# Altium PCB autoPCB.PcbDoc
Units mil, origin at the board's own origin, x right, y up, seen from the top; angles counter-clockwise.
Board outline 6000 x 3990 mil, 2 copper layers (Top Layer, Bottom Layer); 55 components, 51 nets, 226 pads, 23 vias.
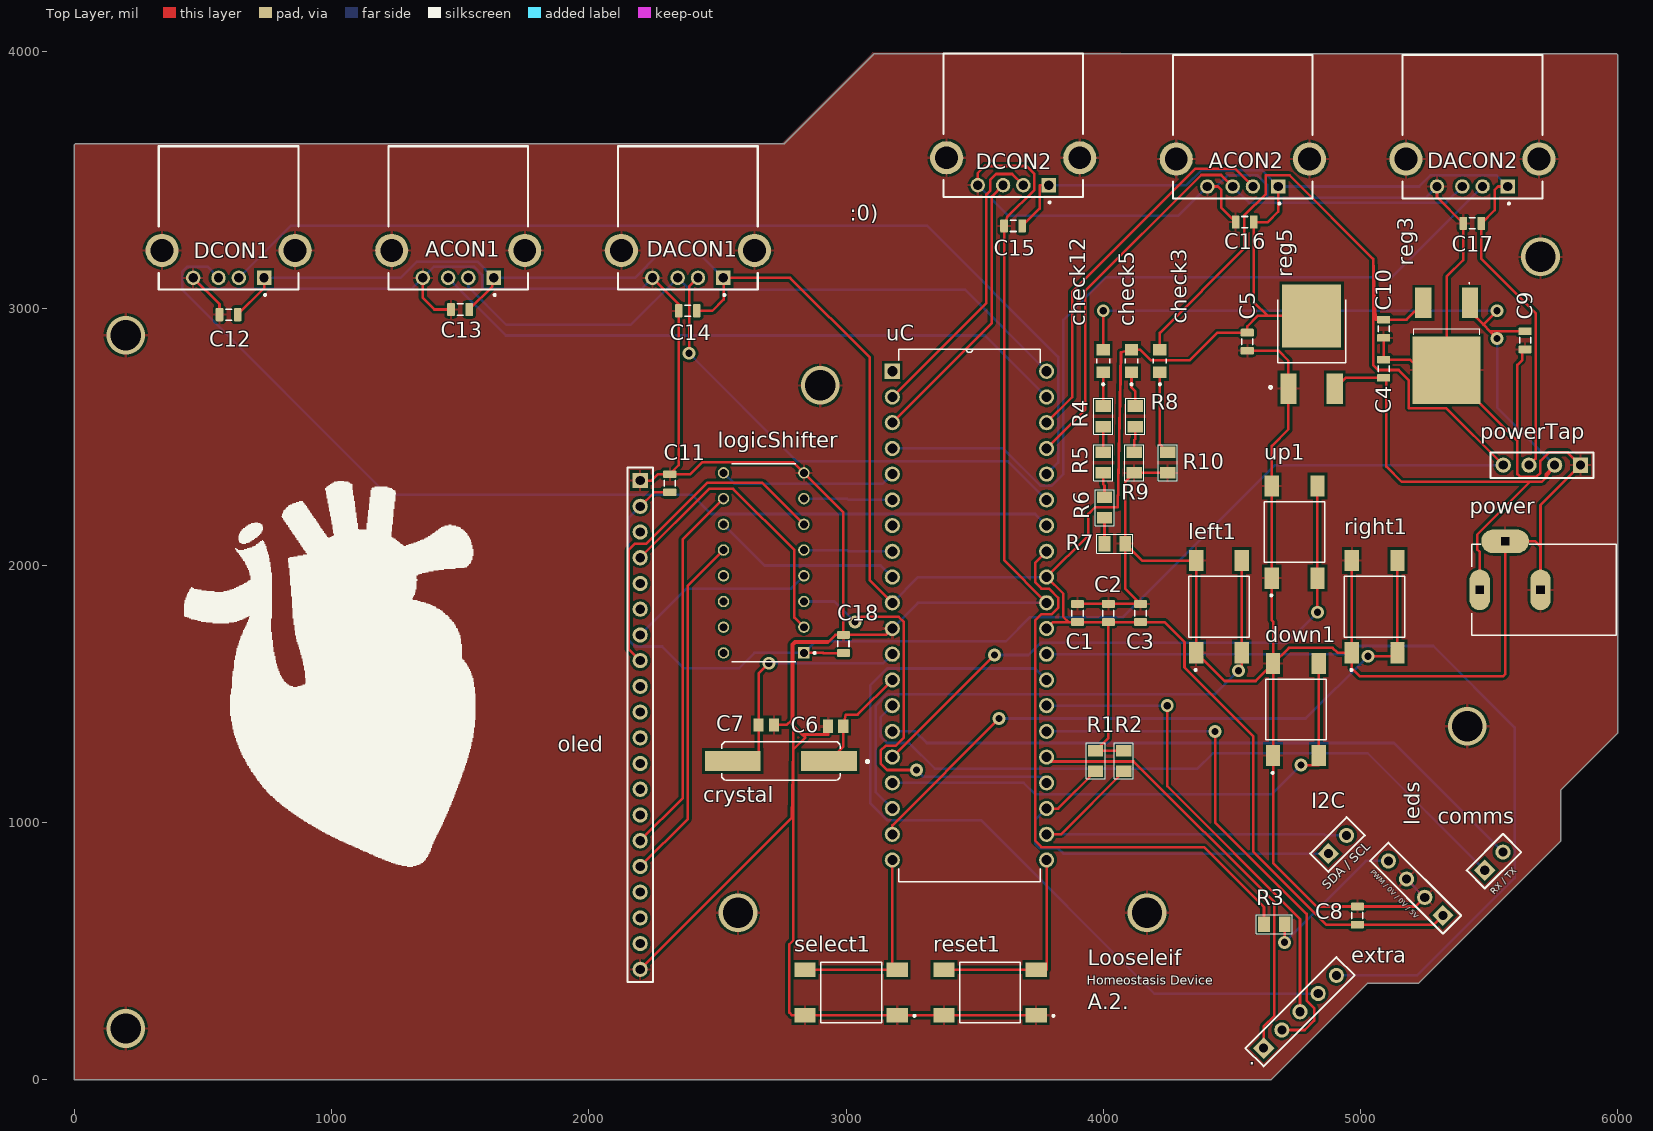
[diagram p0: Top Layer view]
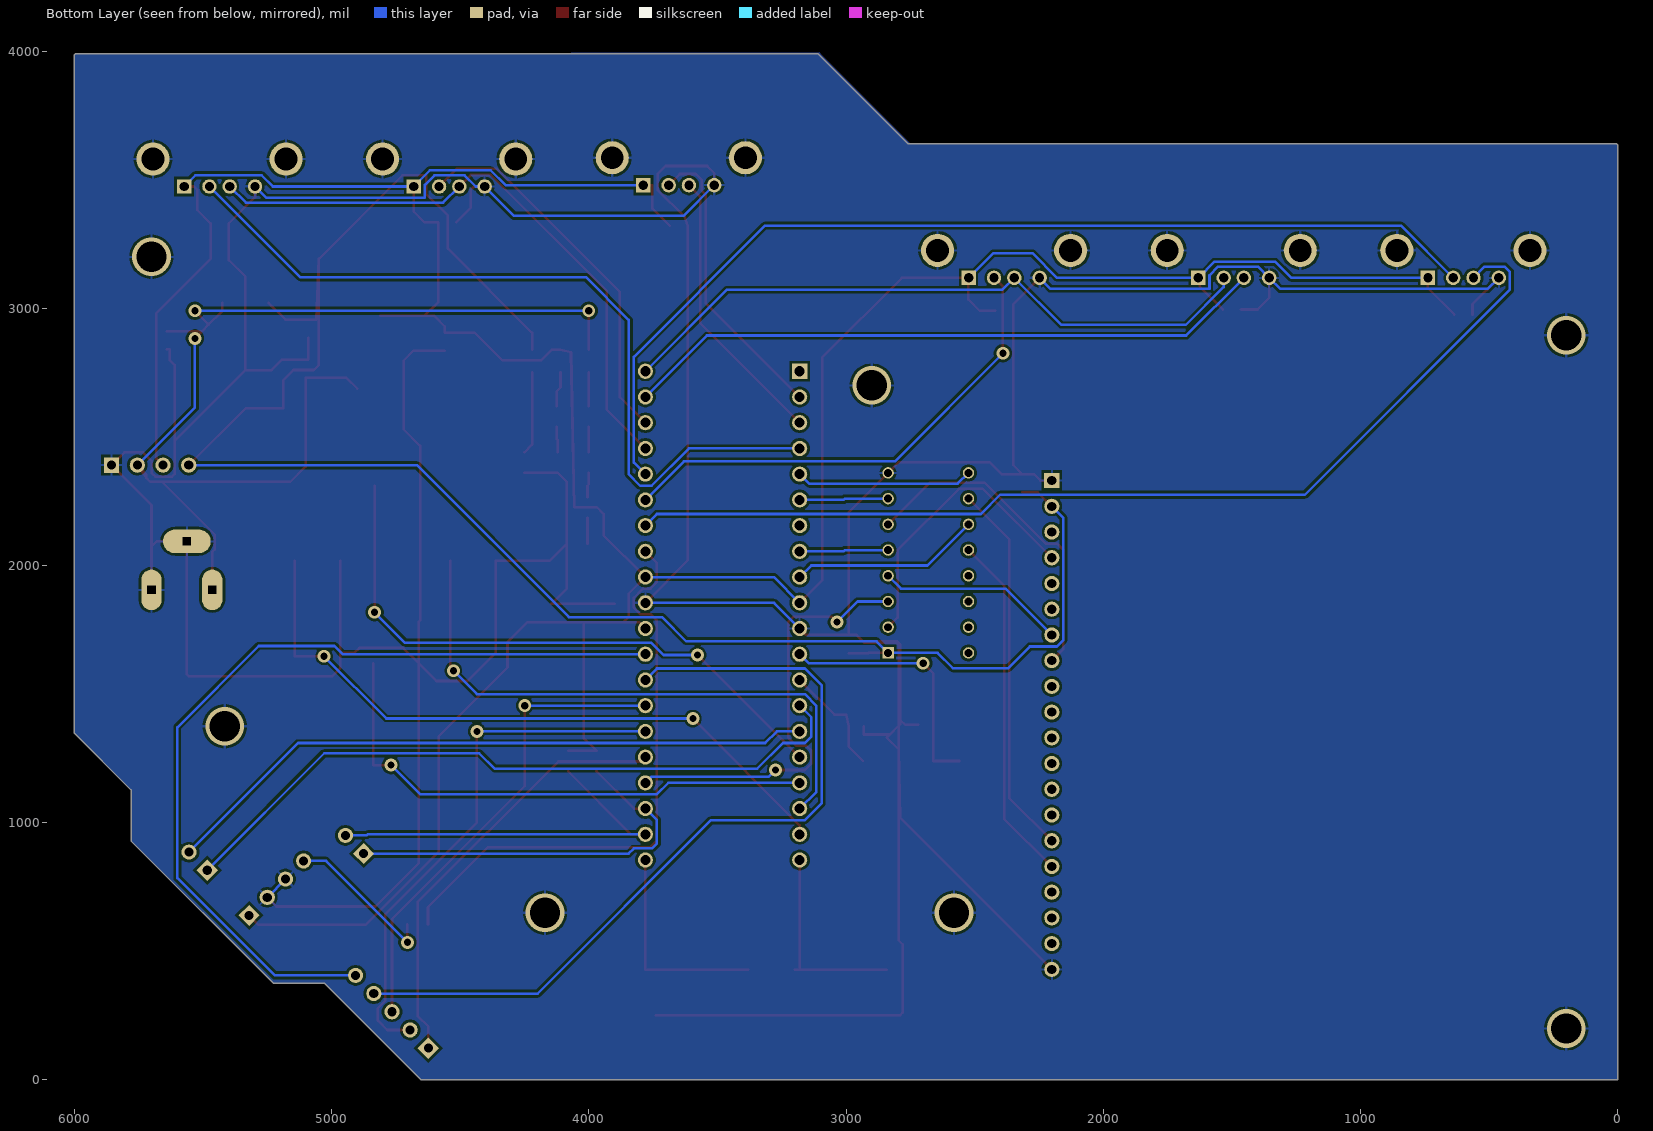
[diagram p1: Bottom Layer view, seen from below]
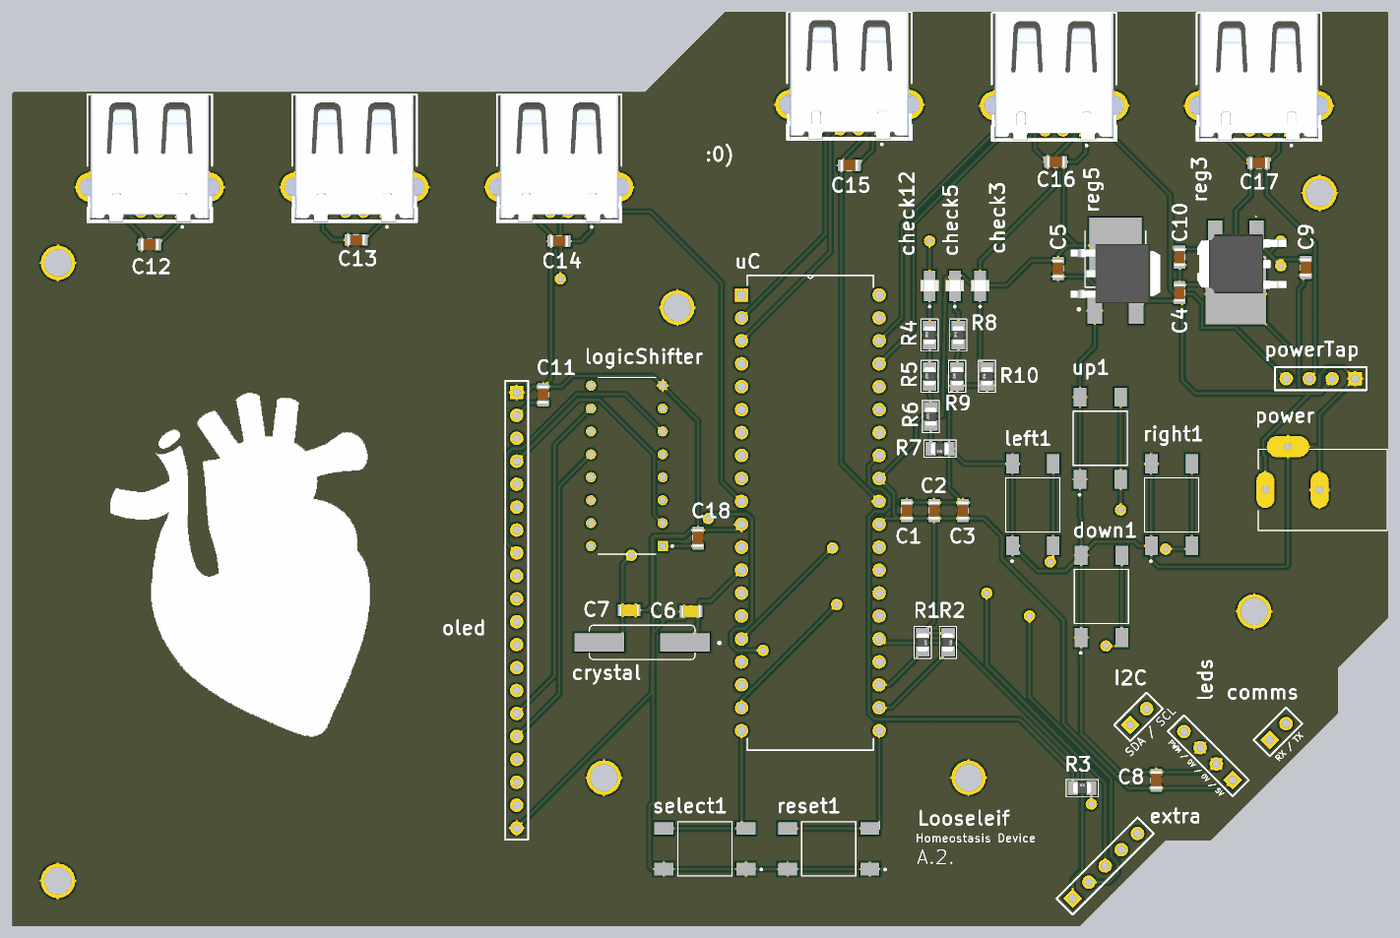
[diagram p2: 3D render of the assembled board from above, using the file's embedded part models]

## Layer stack, top to bottom
Top Solder: solder mask 0.4, Solder Resist, Dk 3.5
Top Layer: signal copper 1.4
Dielectric 1: dielectric 12.6, FR-4, Dk 4.8
Bottom Layer: signal copper 1.4
Bottom Solder: solder mask 0.4, Solder Resist, Dk 3.5

## Board outline
0,315 0,3634.14 5.86,3640 2760,3640 3110,3990 5994.14,3990 6000,3984.14 6000,1348.41 5779.15,1127.55 5779.15,929.15 5225.85,375.85 5027.45,375.85 4651.59,0 0,0

## Design rules (kind name [scope] priority, off if disabled: settings)
Clearance [All] p1: gap=10 ignorepadtopadclearanceinfootprint=FALSE except(0: Arc-Hole Track-Hole SMDPad-Hole THPad-Hole Via-Hole Fill-Hole Poly-Hole Region-Hole Text-Hole)
PolygonConnect [All] p1: connectstyle=Relief reliefconductorwidth=10 reliefentries=4 polygonreliefangle="90 Angle" airgapwidth=10
RoutingVias [All] p1: holewidth=28 width=50 viastyle="Through Hole" minholewidth=28 minwidth=50 maxholewidth=28 maxwidth=50
SolderMaskExpansion [All] p1: expansion=4 istentingtop=FALSE
Width [All] p1: maxlimit=10 minlimit=10 preferedwidth=10
30 further rules are at their usual default settings.

## Components (designator, comment, footprint, x,y, rotation, side; value= is the part's Value field where it differs from the comment)
ACON1 "USB1130-15-A_REVA" GCT_USB1130-15-A_REVA 1492.63,3225 r180 top
ACON2 "USB1130-15-A_REVA" GCT_USB1130-15-A_REVA 4542.63,3580 r180 top
C1 "Capacitor 4.7µF +/-40% 25V 0805" CAPC0805(2012)145_L 3900,1815 r270 top value=100nF
C2 "Capacitor 4.7µF +/-40% 25V 0805" CAPC0805(2012)145_L 4020,1815 r270 top value=100nF
C3 "Capacitor 4.7µF +/-40% 25V 0805" CAPC0805(2012)145_L 4145,1815 r270 top value=100nF
C4 "Capacitor 4.7µF +/-40% 25V 0805" CAPC0805(2012)145_L 5090,2765 r90 top value="10 uF"
C5 "Capacitor 4.7µF +/-40% 25V 0805" CAPC0805(2012)145_L 4560,2870 r270 top value="22 uF"
C6 "Capacitor 1 uF +/- 10% 50 V 0805" CAPC2013X135X45ML10T25 2960,1375 r0 top value=20pF
C7 "Capacitor 1 uF +/- 10% 50 V 0805" CAPC2013X135X45ML10T25 2690,1380 r180 top value=20pF
C8 "Capacitor 4.7µF +/-40% 25V 0805" CAPC0805(2012)145_L 4987.84,639.29 r90 top value=100nF
C9 "Capacitor 4.7µF +/-40% 25V 0805" CAPC0805(2012)145_L 5640,2875 r270 top value="100 nF"
C10 "Capacitor 4.7µF +/-40% 25V 0805" CAPC0805(2012)145_L 5090,2920 r270 top value="2.2 uF"
C11 "Capacitor 4.7µF +/-40% 25V 0805" CAPC0805(2012)145_L 2315,2320 r90 top value=220nF
C12 "Capacitor 4.7µF +/-40% 25V 0805" CAPC0805(2012)145_L 600,2975 r0 top value=100nF
C13 "Capacitor 4.7µF +/-40% 25V 0805" CAPC0805(2012)145_L 1500,2995 r0 top value=100nF
C14 "Capacitor 4.7µF +/-40% 25V 0805" CAPC0805(2012)145_L 2385,2990 r0 top value=100nF
C15 "Capacitor 4.7µF +/-40% 25V 0805" CAPC0805(2012)145_L 3650,3320 r0 top value=100nF
C16 "Capacitor 4.7µF +/-40% 25V 0805" CAPC0805(2012)145_L 4550,3335 r0 top value=100nF
C17 "Capacitor 4.7µF +/-40% 25V 0805" CAPC0805(2012)145_L 5435,3330 r0 top value=100nF
C18 "Capacitor 4.7µF +/-40% 25V 0805" CAPC0805(2012)145_L 2990,1695 r90 top value=100nF
check3 "7012X1" LED_7012X1 4220,2795 r90 top
check5 "7012X1" LED_7012X1 4110,2795 r90 top
check12 "7012X1" LED_7012X1 4000,2795 r90 top
comms "Header 2" HDR1X2 5483.28,815 r45 top
crystal "FOXSDLF/160-20" XTAL_FOXSDLF/160-20 2747.01,1240 r180 top
DACON1 "USB1130-15-A_REVA" GCT_USB1130-15-A_REVA 2385.25,3225 r180 top
DACON2 "USB1130-15-A_REVA" GCT_USB1130-15-A_REVA 5435.25,3580 r180 top
DCON1 "USB1130-15-A_REVA" GCT_USB1130-15-A_REVA 600,3225 r180 top
DCON2 "USB1130-15-A_REVA" GCT_USB1130-15-A_REVA 3650,3585 r180 top
down1 "4-1437565-2" SW_4-1437565-2 4749,1440 r90 top
extra "Header 5" HDR1X5 4623.58,123.58 r45 top
I2C "Header 2" HDR1X2 4875.3,880 r45 top
leds "Header 4" HDR1X4 5320.71,639.29 r135 top
left1 "4-1437565-2" SW_4-1437565-2 4450,1840 r90 top
logicShifter "CD4050BE" DIP794W45P254L1969H508Q16 2680,2010 r180 top
oled "Header 20" HDR1X20 2200,2330 r270 top
power "DC-005" NINIGI_DC-005 5562.2,1905 r180 top
powerTap "Header 4" HDR1X4 5855,2390 r180 top
R1 "R_0805_4.7K_1%" 0805_Resistor 3970,1240 r270 top value=4.7K
R2 "R_0805_4.7K_1%" 0805_Resistor 4080,1240 r270 top value=4.7K
R3 "R_0805_4.7K_1%" 0805_Resistor 4665,605 r0 top value=220
R4 "R_0805_4.7K_1%" 0805_Resistor 4000,2580 r90 top value=220
R5 "R_0805_4.7K_1%" 0805_Resistor 4000,2400 r90 top value=220
R6 "R_0805_4.7K_1%" 0805_Resistor 4005,2225 r90 top value=220
R7 "R_0805_4.7K_1%" 0805_Resistor 4045,2085 r180 top value=220
R8 "R_0805_4.7K_1%" 0805_Resistor 4125,2580 r90 top value=220
R9 "R_0805_4.7K_1%" 0805_Resistor 4120,2400 r90 top value=220
R10 "R_0805_4.7K_1%" 0805_Resistor 4250,2400 r90 top value=220
reg3 "LF33CDT-TRY" LD1117DT33 5335,2890 r90 top
reg5 "NCP1117DT33" VREG_NCP1117DT33 4810,2847.95 r0 top
reset1 "4-1437565-2" SW_4-1437565-2 3560,340 r180 top
right1 "4-1437565-2" SW_4-1437565-2 5055,1840 r90 top
select1 "4-1437565-2" SW_4-1437565-2 3020,340 r180 top
uC "ATMEGA644PV-10PU" DIP254P1524X483-40 3780,855 r0 top
up1 "4-1437565-2" SW_4-1437565-2 4744,2130 r90 top

## Footprints (in the part's own frame and the unit in brackets; to place one, negate y for a bottom-side part, rotate by r counter-clockwise, add the part's x,y. Pads: shape width x height; smd on the part's side, far side on the other; paste and mask are expansions set on the pad)
0805_Resistor [mil] "0805 Resistor"
  rect 45x60 smd: 1(-40,0) 2(40,0)
  silkscreen extent -70,-37 70,37, body extent -39,-25 39,25, height 31
CAPC0805(2012)145_L [mm] "Chip Capacitor, Body 2.0x1.2mm, Height 1.45mm, IPC High Density"
  rrect25% 0.76x1.3 smd: 1(-0.9,0) 2(0.89,0)
  silkscreen extent -0.3,-0.55 0.3,0.55, body extent -1,-0.6 1,0.6, height 1.45
CAPC2013X135X45ML10T25 [mm] "Chip Capacitor, 2-Leads, Body 2.10x1.35mm, IPC Low Density"
  rect 1x1.3 smd: 1(-0.75,0) 2(0.75,0)
  body extent -1.05,-0.67 1.05,0.67, height 1.35
DIP254P1524X483-40 [mil]
  rect 59x59 hole 39: 1(-600,1900)
  round 59 hole 39: 2(-600,1800) 3(-600,1700) 4(-600,1600) 5(-600,1500) 6(-600,1400) 7(-600,1300) 8(-600,1200) 9(-600,1100) 10(-600,1000) 11(-600,900) 12(-600,800) 13(-600,700) 14(-600,600) 15(-600,500) 16(-600,400) 17(-600,300) 18(-600,200) 19(-600,100) 20(-600,0) 21(0,0) 22(0,100) 23(0,200) 24(0,300) 25(0,400) 26(0,500) 27(0,600) 28(0,700) 29(0,800) 30(0,900) 31(0,1000) 32(0,1100) 33(0,1200) 34(0,1300) 35(0,1400) 36(0,1500) 37(0,1600) 38(0,1700) 39(0,1800) 40(0,1900)
  silkscreen extent -575,-85 -25,1985, body extent -620,-85 20,1985
DIP794W45P254L1969H508Q16 [mm]
  rect 1.13x1.13 hole 0.78: 1(-3.97,8.89)
  round 1.13 hole 0.78: 2(-3.97,6.35) 3(-3.97,3.81) 4(-3.97,1.27) 5(-3.97,-1.27) 6(-3.97,-3.81) 7(-3.97,-6.35) 8(-3.97,-8.89) 9(3.97,-8.89) 10(3.97,-6.35) 11(3.97,-3.81) 12(3.97,-1.27) 13(3.97,1.27) 14(3.97,3.81) 15(3.97,6.35) 16(3.97,8.89)
  silkscreen extent -5.13,-9.77 3.18,9.77, body extent -3.17,-9.65 3.17,9.65
GCT_USB1130-15-A_REVA [mm]
  rect 1.428x1.428 hole 0.92: 1(-3.5,2.71)
  round 1.428 hole 0.92: 2(-1,2.71) 3(1,2.71) 4(3.5,2.71)
  round 3.276 hole 2.26: S1(-6.57,0) S2(6.57,0)
  silkscreen extent -6.9,-10.28 6.9,4.5, body extent -7.8,-10.28 7.8,3.88, height 6.99
HDR1X2 [mm] "Connector; Header; 2 Position"
  rect 1.5x1.5 hole 0.9: 1(0,0)
  round 1.5 hole 0.9: 2(2.54,0)
  silkscreen extent -1.27,-1.27 3.81,1.27
HDR1X4 [mm] "Connector; Header; 4 Position"
  rect 1.5x1.5 hole 0.9: 1(0,0)
  round 1.5 hole 0.9: 2(2.54,0) 3(5.08,0) 4(7.62,0)
  silkscreen extent -1.27,-1.27 8.89,1.27
HDR1X5 [mm] "Connector; Header; 5 Position"
  rect 1.5x1.5 hole 0.9: 1(0,0)
  round 1.5 hole 0.9: 2(2.54,0) 3(5.08,0) 4(7.62,0) 5(10.16,0)
  silkscreen extent -1.27,-1.27 11.43,1.27
HDR1X20 [mm] "Connector; Header; 20 Position"
  rect 1.5x1.5 hole 0.9: 1(0,0)
  round 1.5 hole 0.9: 2(2.54,0) 3(5.08,0) 4(7.62,0) 5(10.16,0) 6(12.7,0) 7(15.24,0) 8(17.78,0) 9(20.32,0) 10(22.86,0) 11(25.4,0) 12(27.94,0) 13(30.48,0) 14(33.02,0) 15(35.56,0) 16(38.1,0) 17(40.64,0) 18(43.18,0) 19(45.72,0) 20(48.26,0)
  silkscreen extent -1.27,-1.27 49.53,1.27
LD1117DT33 [mm]
  rect 3x1.6 smd: 1(3.325,-2.3) 2(3.325,2.3)
  rect 6.7x6.7 smd: 3(-3.325,0)
  silkscreen extent 0.18,-3.25 5.32,3.25, body extent -3.27,-5.6 3.27,4.27, height 2.4
LED_7012X1 [mm]
  rect 1.15x1.3 smd: A(1.125,0) C(-1.125,0)
  silkscreen extent -2.4,-0.62 0.23,0.62, body extent -0.62,-1 0.62,1, height 0.73
NINIGI_DC-005 [mm]
  oval 4.7x2.35 hole 0.8 square: 2(0,-4.8)
  oval 2x4 hole 0.8 square: 3(-3.5,0) 4(2.5,0)
  silkscreen extent -11,-4.5 3.3,4.5, body extent -11.06,-4.56 3.36,4.56
SW_4-1437565-2 [mm]
  rect 2.1x1.4 smd: 1(-4.55,2.25) 2(4.55,2.25) 3(-4.55,-2.25) 4(4.55,-2.25)
  silkscreen extent -6.35,-3 3,3
VREG_NCP1117DT33 [mm]
  rect 1.6x3 smd: 1(-2.285,-4.08) 3(2.285,-4.08)
  rect 5.8x6.2 smd: 4(0,3.1)
  silkscreen extent -4.19,-4.09 3.36,4.72, body extent -4.95,-3.25 4.95,3.25, height 2.39
XTAL_FOXSDLF/160-20 [mm]
  rect 5.5x2 smd: 1(-4.75,0) 2(4.75,0)
  silkscreen extent -8.6,-1.9 5.85,1.9

## Part data
ACON1 ACON2 DACON1 DACON2 DCON1 DCON2 down1 left1 logicShifter reset1 right1 select1 up1: Package=None, Availability=Unavailable, Price=None
  ACON1 ACON2 DACON1 DACON2 DCON1 DCON2: MF="{'manufacturer': u'Global Connector Technology'}", MP=USB1130-15-A_REVA
  down1 left1 reset1 right1 select1 up1: MF="{'manufacturer': u'TE Connectivity'}", MP=4-1437565-2
  logicShifter: MF="{'manufacturer': u'Texas Instruments'}", MP=CD4050BE
C1 C2 C3 C4 C5 C8 C9 C10 C11 C12 C13 C14 C15 C16 C17 C18: library part CMP-001-00080-5, "Chip Capacitor, 4.7µF +/-40%, 25V, 0805, Thickness 1.45 mm", Capacitor Type=Ceramic, Case/Package=0805, Max Operating Temperature=85°C, Min Operating Temperature=-55°C, Tolerance=20%, Voltage Rating=25V, Mounting Technology=SMT, Pins=2
C6 C7: library part CMP-001-00007-7, "Chip Capacitor, 1 uF, +/- 10%, 50 V, 0805 (2012 Metric)", Capacitor Type=Ceramic, Case/Package=0805, Max Operating Temperature=125°C, Min Operating Temperature=-55°C, Tolerance=10%, Voltage Rating=50V, Mounting Technology=SMT, Pins=2
check3 check5 check12: "Red LED Indication - Discrete 1.7V 0805 (2012 Metric)", Package=None, Availability=Unavailable, MF="{'manufacturer': u'Visual'}", MP=7012X1, Price=None
comms I2C: "Header, 2-Pin", LatestRevisionDate=17-Jul-2002, LatestRevisionNote="Re-released for DXP Platform.", Publisher="Altium Limited"
crystal: "Crystal 16MHz 20pF 2-Pin HC-49/SD", Package=None, Availability=Unavailable, MF="{'manufacturer': u'Fox Electronics'}", MP=FOXSDLF/160-20, Price=None
extra: "Header, 5-Pin", LatestRevisionDate=17-Jul-2002, LatestRevisionNote="Re-released for DXP Platform.", Publisher="Altium Limited"
leds powerTap: "Header, 4-Pin", LatestRevisionDate=17-Jul-2002, LatestRevisionNote="Re-released for DXP Platform.", Publisher="Altium Limited"
oled: "Header, 20-Pin", LatestRevisionDate=17-Jul-2002, LatestRevisionNote="Re-released for DXP Platform.", Publisher="Altium Limited"
power: "DC Jack", Package=None, Availability=Unavailable, MF="{'manufacturer': u'Best Inc.'}", MP=DC-005, Price=None
R1 R2 R3 R4 R5 R6 R7 R8 R9 R10: library part CMP-058-000045-1, "RES 4.7K OHM 1/8W 1% 0805 SMD", Manufacturer=Yageo, Manufacturer Part Number=AC0805FR-074K7L, Package=0805_Resistor, Power Rating=0.125W, ComponentLink1Description=DigiKey, ComponentLink1URL=https://www.digikey.com/products/en?keywords=YAG3738TR-ND, Design Item ID=R_0805_4.7K_1%, DigiKey PN=YAG3738TR-ND, Source=resistor.SchLib, SVP Creator="Andrew Wu"
reg3: "<b>Linear Voltage Regulators VLDV Reg Inhibit 0.45V 50uA 500mA</b><p> Source: <a href=\"https://componentsearchengine.com/Datasheets/1/LF33CDT-TRY.pdf\"> Datasheet </a>", Package=None, Availability=Unavailable, MF="{'manufacturer': u'STMicroelectronics'}", MP=LF33CDT-TRY, Price=None
reg5: "1.0 A Positive LDO Linear Voltage Regulator (Fixed and Adjustable) Vout: 3.3 V", Package=None, Availability=Unavailable, MF="{'manufacturer': u'ON Semiconductor'}", MP=NCP1117DT33, Price=None
uC: "8-bit Microcontroller with In-System Programmable  Flash", Package=None, Availability=Unavailable, MF="{'manufacturer': u'Microchip Technology'}", MP=ATMEGA644PV-10PU, Price=None

## Via types
v1: diameter 50, hole 28, Top Layer to Bottom Layer, 16 vias
v2: diameter 150, hole 118.11, Top Layer to Bottom Layer, 7 vias

## Nets (pads, with @x,y where several pads share a name; then routed paths per layer and width w, separated by ;. In a path a pad name is that pad's centre, name@x,y a point inside that pad or via, vN(x,y) a via of type N, cw(c..) or ccw(c..) an arc to the next point about the centre after c; other vN are vias at no path point)
+3: C10.1 C11.1 C18.1 check3.A logicShifter.1 oled.2 powerTap.4 reg3.2 | length 7593.3
  Top Layer w10: oled.2 2254.57,2284.57 C11.1 ; logicShifter.1 2912,1660 2912.43,1659.57 C18.1 ; check3.A 4220,2904 4548,3232 4548,3360 4632,3444 4632,3517 4724,3517 5049,3192 ; reg3.2 5178.98,2955.43 C10.1 5060,2955.43 5049,3192 ; powerTap.4 5333,2612 5188,2612 5188,2720 5148,2760 5069,2760 5049,2780 5049,3192
  Bottom Layer w10: oled.2 2155,2185 2155,1710 2180,1685 2285,1685 2369,1601 2585,1601 2644,1660 logicShifter.1 2881.3,1705 3621,1705 3715.5,1799.5 4077.5,1799.5 4668,2390 powerTap.4
+5: ACON1.1 ACON2.1 C1.2 C2.2 C3.2 C5.1 C8.1 C12.2 C13.2 C14.2 C15.2 C16.2 C17.2 check5.A DACON1.1 DACON2.1 DCON1.1 DCON2.1 leds.1 powerTap.3 R1.1 R2.1 reg5.4 uC.10 uC.30 uC.32 | length 13840.4
  Top Layer w10: C12.2 737.8,3077.76 DCON1.1 ; C13.2 1625,3084.96 1625,3118.31 ACON1.1 ; C14.2 2480,2990 2524,3034 DACON1.1@2524,3118.31 ; DACON1.1 DACON1.1@2524,3118.31 ; uC.10 3093,1942 3093,2808 2782.69,3118.31 DACON1.1@2524,3118.31 ; C15.2 3752.48,3387.44 3752.48,3478.31 DCON2.1 ; uC.30 3804.96,1779.96 3864.54,1779.96 ; R2.1 R1.1 4020,1330 C2.2 ; ACON2.1 4680.42,3375.42 4640,3335 C16.2 4585.04,3024.96 4640,2970 ; reg5.4 4640,2970 ; leds.1 5285.28,603.86 C8.1 4866.65,603.86 4584,886.51 4584,1335.52 4316,1603.52 4316,1701.96 4238,1779.96 C3.2 C2.2 ; DACON2.1 5535.31,3473.31 5522,3460 5522,3381.96 C17.2 5470.04,3192 5681,2981.04 5681,2416 powerTap.3 ; 3864.54,1779.96 C1.2 C2.2 ; 3864.54,1779.96 3844.5,1800 3844.5,1890.5 uC.32 3942,2117 3942,2200 3969,2227 4056,2227 4069,2828.29 check5.A 4143.71,2839.29 4186,2797 4335.57,2797 4444,2905.43 C5.1 4560,2930 4600,2970 4640,2970
  Bottom Layer w10: DCON1.1 1268.31,3118.31 1331.42,3181.42 1567.31,3181.42 ACON1.1 2179.31,3118.31 2275,3214 2427.36,3214 DACON1.1 ; uC.10 3280,1955 uC.32 ; DCON2.1 4323.31,3478.31 4381.42,3536.42 4617.31,3536.42 ACON2.1 5228.31,3473.31 5272,3517 5529.36,3517 DACON2.1
+12: C4.1 C9.1 check12.A power.4 powerTap.2 reg3.1 reg5.3 | length 4510.4
  Top Layer w10: check12.A v1(4000,2990) ; reg5.3 4942.2,2729.57 C4.1 5101,2729.57 5101,2384.47 5160,2325.47 5659.47,2325.47 ; reg3.1 5425.55,2988 5477.62,2935.93 ; power.4 5463.78,2052.22 5454,2062 5454,2120 5659.47,2325.47 ; v1(5531,2882.55) 5503.12,2910.43 ; v1(5531,2990) 5531,2989.32 5477.62,2935.93 ; C9.1 5503.12,2910.43 ; 5477.62,2935.93 5503.12,2910.43 ; 5659.47,2325.47 5705,2325.47 5719.53,2340 ; 5719.53,2340 powerTap.2 5719.53,2354.53 5719.53,2340
  Bottom Layer w10: v1(4000,2990) v1(5531,2990) ; v1(5531,2882.55) 5531,2614 powerTap.2
ACON1-A1: ACON1.2 DACON1.3 uC.40 | length 2571.5
  Bottom Layer w10: ACON1.2 1532,3082.25 1679.24,2935 2162.57,2935 DACON1.3 2392.19,3072 3463,3072 uC.40
ACON1-A2: ACON1.3 uC.39 | length 2518.7
  Bottom Layer w10: ACON1.3 1677.56,2894 3541,2894 uC.39
ACON2-A1: ACON2.2 uC.38 | length 1479.5
  Top Layer w10: uC.38 3879,2654 3879,3062.62 4359.38,3543 4512.3,3543 ACON2.2
ACON2-A2: ACON2.3 DACON2.3 uC.37 | length 2397.6
  Top Layer w10: uC.37 3930,2605 3930,3067 4381,3518 4458.56,3518 ACON2.3
  Bottom Layer w10: ACON2.3 4566.37,3410.2 5332.77,3410.2 DACON2.3
DACON1-D1: DACON1.2 uC.35 | length 1933.8
  Top Layer w10: v1(2390,2825) 2390,3083.68 DACON1.2
  Bottom Layer w10: v1(2390,2825) 2810,2405 3630,2405 uC.35
DACON2-D1: DACON2.2 uC.4 | length 3188
  Bottom Layer w10: uC.4 3611,2455 3756,2310 3800,2310 3845,2355 3845,2955 4011,3121 5122.32,3121 DACON2.2
DC: logicShifter.3 uC.24 | length 1724.6
  Top Layer w10: v1(3035,1780) 3055,1800 3205,1800 3225,1780 3225,1331 3194,1300 3155,1300 3135,1280 3135,1230 3160,1205 v1(3274,1205)
  Bottom Layer w10: logicShifter.3 2955,1860 v1(3035,1780) ; v1(3274,1205) 3301,1178 3757,1178 uC.24
DCON1-D1: DCON1.2 uC.36 | length 3954.6
  Bottom Layer w10: DCON1.2 841.06,3320 3316,3320 3825,2811 3825,2400 uC.36
DCON1-D2: DCON1.3 uC.34 | length 3978.3
  Bottom Layer w10: DCON1.3 516.94,3162 440,3162 419,3141 419,3072 1216,2275 2401,2275 2476,2200 3735,2200 uC.34
DCON2-D1: DCON2.2 uC.2 | length 1158.4
  Top Layer w10: uC.2 3546,3021 3546,3443 3561,3458 3561,3500 3583,3522 3645.68,3522 DCON2.2
DCON2-D2: DCON2.3 uC.3 | length 1101.7
  Top Layer w10: uC.3 3567,2942 3567,3434.68 DCON2.3
dwn: down1.3 down1.4 uC.17 | length 2118.6
  Top Layer w10: v1(4769,1224) 4837.58,1224 down1.3 down1.4
  Bottom Layer w10: uC.17 3691,1155 3736,1110 4655,1110 v1(4769,1224)
ex1: extra.1 uC.25 | length 1703.2
  Top Layer w10: uC.25 3797,1238 4118,1238 4665,691 4665,249 4623.58,207.58 extra.1
ex2: extra.2 uC.26 | length 2079.4
  Top Layer w10: v1(4435,1355) 4435,1001 4791,645 4791,308.09 4820,279.09 4820,230.92 4783.37,194.29 extra.2
  Bottom Layer w10: uC.26 v1(4435,1355)
ex3: extra.3 uC.27 | length 1872.7
  Top Layer w10: v1(4249,1455) 4249,1141.7 4765,625.7 extra.3
  Bottom Layer w10: uC.27 v1(4249,1455)
ex4: extra.4 uC.28 | length 3236.8
  Bottom Layer w10: uC.28 3735.5,1599.5 3160,1599.5 3095,1534.5 3095,1075 3160,1010 3524,1010 4198.29,335.71 extra.4
ex5: extra.5 uC.29 | length 3398.6
  Bottom Layer w10: uC.29 4956.91,1655 4989,1687.09 5282.91,1687.09 5599,1371 5599,785 5220.42,406.42 extra.5
GND: ACON1.4 ACON1.S1 ACON1.S2 ACON2.4 ACON2.S1 ACON2.S2 C1.1 C2.1 C3.1 C4.2 C5.2 C6.1 C7.1 C8.2 C9.2 C10.2 C11.2 C12.1 C13.1 C14.1 C15.1 C16.1 C17.1 C18.2 DACON1.4 DACON1.S1 DACON1.S2 DACON2.4 DACON2.S1 DACON2.S2 DCON1.4 DCON1.S1 DCON1.S2 DCON2.4 DCON2.S1 DCON2.S2 down1.1 down1.2 leds.2 leds.3 left1.1 left1.2 logicShifter.8 oled.1 oled.20 power.2 power.3 powerTap.1 R7.1 R9.1 R10.1 reg3.3 reg5.1 reset1.1 reset1.2 right1.1 right1.2 select1.1 select1.2 uC.11 uC.31 up1.1 up1.2 | length 23969.5
  Top Layer w10: DCON1.4 564.57,3015.95 C12.1 ; ACON1.4 1354.83,3040 1399.83,2995 C13.1 ; oled.20 2789.53,1019.53 2795,1284 ; oled.1 2244,2330 2269.04,2355.04 C11.2 ; DACON1.4 2349.57,3016.2 C14.1 2349.57,2389.61 C11.2 ; C7.1 2769.53,1380 2789.53,1400 ; C6.1 2930.47,1342.94 2829.53,1342.94 ; uC.11 3155.04,1730.04 C18.2 ; DCON2.4 3512.2,3525.2 3540,3553 3701.48,3553 3732.48,3522 3732.48,3460 3626.61,3354.13 C15.1 3614.57,2020.43 uC.31 ; reset1.1 reset1.2 select1.1 select1.2 2790,251.42 2779.58,261.84 2779.58,527.58 2795,543 2795,1284 ; C1.1 C2.1 C3.1 4085,1910.43 R7.1 ; R10.1 R9.1 4085,2325 R7.1 ; ACON2.4 4445.69,3473.31 4459,3460 4459,3390.57 C16.1 ; C5.2 4681,2834.96 4720.04,2795.92 reg5.1 4720.04,2529.62 4655.42,2465 up1.2 up1.1 4655.42,1787 4660.42,1782 down1.2 ; right1.2 right1.1 ; C10.2 C4.2 5192,2800.04 5232.95,2759.09 reg3.3 ; leds.2 5214.33,674.33 C8.2 4829.27,674.33 4660.42,843.18 down1.1 down1.2 ; DACON2.4 5297.46,3432.11 C17.1 5399.57,3187.57 5335,3123 reg3.3 ; C9.2 5629,2839.96 5629,2799 5610,2780 5610,2484.09 ; power.3 5700,2073.98 ; C11.2 2395,2355.04 2441.96,2402 2794.3,2402 logicShifter.8 2990,2206.3 C18.2 ; 2789.53,1400 2789.53,1694.53 2800,1705 2934,1705 ; 2789.53,1400 2789.53,1382.94 2795,1377.47 ; 2795,1284 2795,1377.47 ; 2795,1284 2841.74,1330.74 2829.53,1342.94 ; 2795,1377.47 2795,1690 2805,1700 2929,1700 2934,1705 ; 2795,1377.47 2829.53,1342.94 ; 2934,1705 2959.04,1730.04 C18.2 ; R7.1 4150.87,2019.13 left1.2 left1.1 4471.28,1551 4592.28,1551 down1.2 ; down1.2 4721.28,1680 4892,1680 4911.13,1660.87 right1.1 ; right1.1 4966.42,1600 4997.42,1569 5554,1569 5562.2,1577.2 power.2 5680,2093.98 5700,2073.98 ; reg3.3 5610,2484.09 ; 5610,2484.09 5610,2355.47 5620,2345.47 5685,2345.47 5699.53,2360 5699.53,2407 5732.53,2440 5805,2440 powerTap.1 5700,2235 5700,2073.98
  Bottom Layer w10: DCON1.4 505.51,3075 1311.52,3075 ACON1.4 1397.94,3161.42 1553.69,3161.42 1587,3128.11 1587,3075.2 2204.35,3075.2 DACON1.4 ; uC.11 3280,1855 uC.31 ; DCON2.4 3631.51,3359 4290.52,3359 ACON2.4 4439.31,3473.31 4482.42,3516.42 4600,3516.42 4637.31,3479.11 4637.31,3430.2 5254.35,3430.2 DACON2.4 ; leds.3 5179.29,780.42 5249.71,710 leds.2
  other v2: 200,200 2580,650 4170,650 5415,1375 2900,2700 200,2895 5700,3200
LEDSIG: R3.1 uC.33 | length 2322.1
  Top Layer w10: uC.33 3735,2010 3735,1935 3760,1910 3789,1910 3824.5,1874.5 3824.5,1835 3800,1810.5 3760,1810.5 3735,1785.5 3735,930 3760,905 4392,905 4625,672 R3.1
lft: left1.3 left1.4 uC.18 | length 2327.3
  Top Layer w10: v1(4526,1591) 4538.58,1603.58 left1.3 left1.4
  Bottom Layer w10: uC.18 3115,1120 3115,1454.5 3160,1499.5 4434.5,1499.5 v1(4526,1591)
MISO: uC.7
MOSI: logicShifter.7 uC.6 | length 345.8
  Bottom Layer w10: logicShifter.7 3004,2260 3009,2255 uC.6
Netcheck3_C: check3.C R10.2 | length 323.1
  Top Layer w10: check3.C 4220,2470 R10.2
Netcheck5_C: check5.C R8.2 | length 136.9
  Top Layer w10: check5.C 4110,2692 4125,2677 R8.2
Netcheck12_C: check12.C R4.2 | length 130.7
  Top Layer w10: R4.2 check12.C
Netleds_4: leds.4 R3.2 | length 604.6
  Top Layer w10: v1(4705,535) R3.2
  Bottom Layer w10: v1(4705,535) 5021.42,851.42 leds.4
NetlogicShifter_2: logicShifter.2 oled.4 | length 1124
  Top Layer w10: oled.4 2468,2298 2561,2298 2799,2060 2799,1797.3 logicShifter.2
NetlogicShifter_4: logicShifter.4 oled.7 | length 731.6
  Bottom Layer w10: oled.7 2380,1910 2786.3,1910 logicShifter.4
NetlogicShifter_6: logicShifter.6 oled.8 | length 1305.6
  Top Layer w10: oled.8 2155,1675 2155,2060 2180,2085 2224,2085 2461,2322 2674.3,2322 logicShifter.6
NetlogicShifter_10: logicShifter.10 oled.15 | length 1464.1
  Top Layer w10: oled.15 2365,1095 2365,2101.3 logicShifter.10
NetlogicShifter_12: logicShifter.12 oled.16 | length 1364.1
  Top Layer w10: oled.16 2385,1015 2385,1921.3 logicShifter.12
NetR4_1: R4.1 R5.2 | length 100
  Top Layer w10: R5.2 R4.1
NetR5_1: R5.1 R6.2 | length 97.1
  Top Layer w10: R5.1 4000,2315 4005,2310 R6.2
NetR6_1: R6.1 R7.2 | length 100
  Top Layer w10: R7.2 R6.1
NetR8_1: R8.1 R9.2 | length 102.1
  Top Layer w10: R9.2 4120,2487 4125,2492 R8.1
OSC+: C6.2 crystal.1 uC.13 | length 440.5
  Top Layer w10: crystal.1 2989.53,1295.51 C6.2 2999.53,1420 3045,1420 uC.13
OSC-: C7.2 crystal.2 uC.12 | length 991.3
  Top Layer w10: crystal.2 2660.47,1240 C7.2 2660.47,1580.47 v1(2700,1620)
  Bottom Layer w10: v1(2700,1620) 3145,1620 uC.12
RESET: logicShifter.11 uC.9 | length 741.2
  Bottom Layer w10: logicShifter.11 2683.7,2000 3135,2000 uC.9
rit: right1.3 right1.4 uC.19 | length 2642.9
  Top Layer w10: uC.19 3180,990 v1(3595,1405) ; v1(5029,1647) 5143.58,1647 right1.3 right1.4
  Bottom Layer w10: v1(3595,1405) 4787,1405 v1(5029,1647)
rst: reset1.3 reset1.4 uC.21 | length 825.6
  Top Layer w10: reset1.4 reset1.3 3780,428.58 uC.21
RX: comms.1 uC.14 | length 2752
  Bottom Layer w10: uC.14 3135,1410 3135,1335 3160,1310 3245,1310 3345,1210 4366,1210 4426,1270 5028.28,1270 comms.1
SCK: logicShifter.5 uC.8 | length 345.8
  Bottom Layer w10: logicShifter.5 3004,2060 3009,2055 uC.8
SCL: I2C.2 R2.2 uC.22 | length 1569.3
  Top Layer w10: uC.22 3835,955 R2.2
  Bottom Layer w10: uC.22 4860,955 4864.29,950.71 I2C.2
SDA: I2C.1 R1.2 uC.23 | length 1560.6
  Top Layer w10: uC.23 3825,1055 R1.2
  Bottom Layer w10: uC.23 3735,1010 3735,920 3755,900 3825,900 3845,880 I2C.1
sel: select1.3 select1.4 uC.20 | length 784.7
  Top Layer w10: select1.4 select1.3@3180,428.58 ; uC.20 select1.3@3180,428.58 ; select1.3 select1.3@3180,428.58
SS: logicShifter.9 uC.5 | length 689
  Bottom Layer w10: logicShifter.9 2565.7,2318 3143,2318 uC.5
TX: comms.2 uC.15 | length 2568.4
  Bottom Layer w10: uC.15 3269.04,1355 3314.04,1310 5129.7,1310 comms.2
up: uC.16 up1.3 up1.4 | length 2376.9
  Top Layer w10: uC.16 v1(3577,1652) ; v1(4832.58,1818) up1.3 up1.4
  Bottom Layer w10: v1(3577,1652) 3709,1652 3756.5,1699.5 4714.08,1699.5 v1(4832.58,1818)
pads on no net: logicShifter.13 logicShifter.14 logicShifter.15 logicShifter.16 oled.3 oled.5 oled.6 oled.9 oled.10 oled.11 oled.12 oled.13 oled.14 oled.17 oled.18 oled.19 uC.1

## Polygon pours and split planes (outlines as drawn)
GND on Bottom Courtyard "planeGND" (solid, pour order 2): 0,3634.14 5.86,3640 2750,3640 3100,3990 3100,3995 5994.14,3990 6000,3984.14 6000,3970 6000,1348.41 5779.15,1127.55 5779.15,929.15 5225.85,375.85 5027.45,375.85 4651.59,0 0,0
GND on Bottom Layer "planeGND" (solid, pour order 5): 0,3634.14 5.86,3640 2750,3640 3100,3990 3100,3995 5994.14,3990 6000,3984.14 6000,3970 6000,1348.41 5779.15,1127.55 5779.15,929.15 5225.85,375.85 5027.45,375.85 4651.59,0 0,0
GND on Top Layer "planeGND" (solid, pour order 7): 0,3634.14 5.86,3640 2750,3640 3100,3990 3100,3995 5994.14,3990 6000,3984.14 6000,3970 6000,1348.41 5779.15,1127.55 5779.15,929.15 5225.85,375.85 5027.45,375.85 4651.59,0 0,0

## Silkscreen, mask and mechanical layers (free items; w line width, h text height)
Top Overlay:
  drawing of 3 lines, arcs and shapes, not listed
  text ":0)" at 3015,3340 h60
  text "PWM / 0V / 0V / 5V" at 5037.07,804.92 h20 r314.34
  text "SDA / SCL" at 4870.07,737.07 h35 r44.42
  text "RX / TX" at 5519.84,717.07 h25 r46.33
  text "Looseleif" at 3940,445 h60
  text "Homeostasis Device" at 3935,370 h35
  text "A.2." at 3940,275 h60
  text "." at 4565,60 h60
Mechanical 1:
  the board outline again, w47.24

## Text inside footprints (layer, text, board x,y; h text height)
ACON1: Mechanical 13 "PCB EDGE" at 1199.32,3618.7 h32 r180
ACON2: Mechanical 13 "PCB EDGE" at 4249.32,3973.7 h32 r180
DACON1: Mechanical 13 "PCB EDGE" at 2091.95,3618.7 h32 r180
DACON2: Mechanical 13 "PCB EDGE" at 5141.95,3973.7 h32 r180
DCON1: Mechanical 13 "PCB EDGE" at 306.69,3618.7 h32 r180
DCON2: Mechanical 13 "PCB EDGE" at 3356.69,3978.7 h32 r180